# EAGLE board krajBB-Mojžiš_MatejFIN (EAGLE 7.7.0)
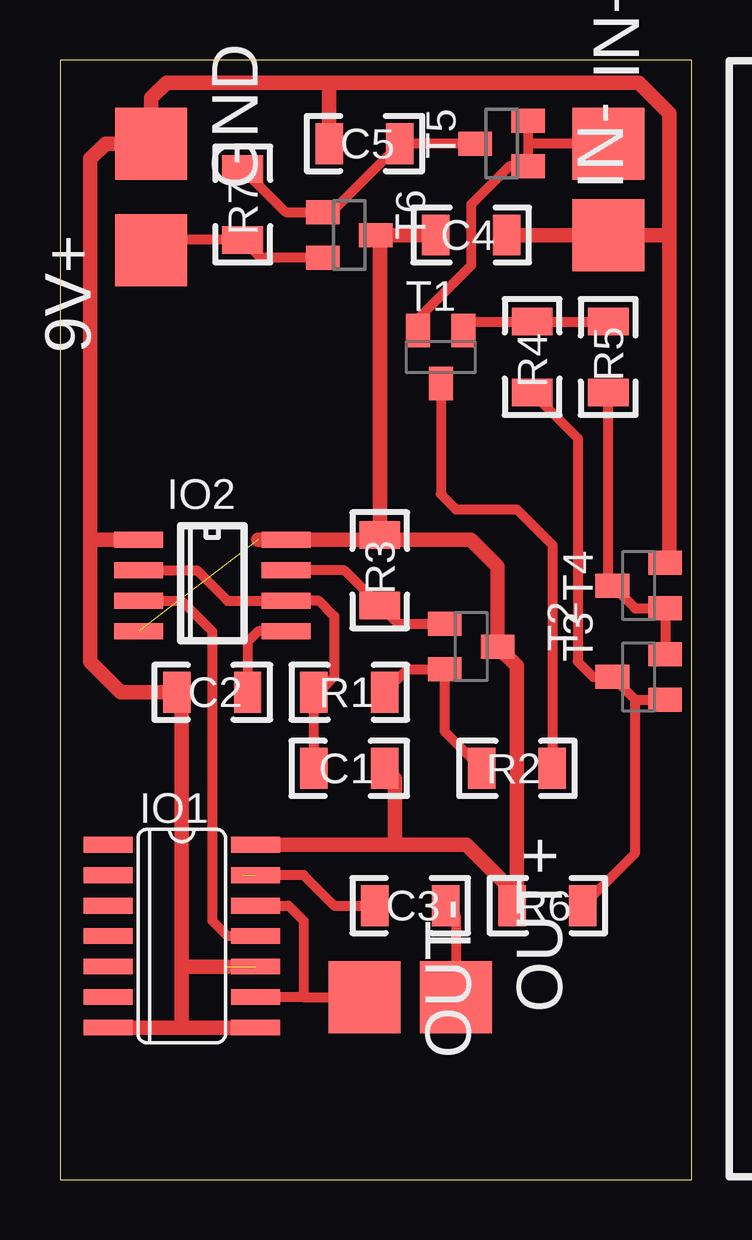
[diagram p0: board, top side]

Size 26.34 x 46.66 mm. Coordinates in mm from the lower left corner, seen from the top.
Outline: 0,0 26.34,0 26.34,46.66 0,46.66 0,0
Copper layers (1*16): Top 0.035mm / dielectric 1.5mm / Bottom 0.035mm
Design rules "default *": minimum track width 10mil, minimum drill 24mil, track to track 8mil, track to pad 8mil, pad to pad 8mil, via to via 8mil, smd to smd 8mil, copper to edge 16mil, drill to drill 8mil, minimum pad ring 10mil, minimum via ring 8mil, stop-mask expansion 4mil, vias tented up to drill 0mil, thermal gap 10mil

## Footprints (pad centres in the part's own frame; a part is rotated, then mirrored left to right if it is on the bottom)
SMD3X3 = smd 3 x 3: P$1 0,0
1206 = smd 1.143 x 1.702: 1 -1.473,0; 2 1.473,0
SO14 = smd 0.66 x 2.032: 1 -3.81,-3.073; 2 -2.54,-3.073; 3 -1.27,-3.073; 4 0,-3.073; 5 1.27,-3.073; 6 2.54,-3.073; 7 3.81,-3.073; 8 3.81,3.073; 9 2.54,3.073; 10 1.27,3.073; 11 0,3.073; 12 -1.27,3.073; 13 -2.54,3.073; 14 -3.81,3.073
SO08 = smd 0.66 x 2.032: 1 -1.905,-3.073; 2 -0.635,-3.073; 3 0.635,-3.073; 4 1.905,-3.073; 5 1.905,3.073; 6 0.635,3.073; 7 -0.635,3.073; 8 -1.905,3.073
LD-DR-3519 = drill 1 pad 1.93 long: P$1 -3,-15; P$2 3,-15
SOT23-BEC = smd 1 x 1.4: B -0.95,-1.1; C 0,1.1; E 0.95,-1.1
SOT23 = smd 1 x 1.4: 1 -0.95,-1.1; 2 0.95,-1.1; 3 0,1.1

## Placement (x,y rotation side)
9V+  SMD3X3  [SMD3X3]  3.81,38.73 270 top
C1  1u  [1206]  12.06,17.14 0 top
C2  1u  [1206]  6.35,20.32 0 top
C3  1u  [1206]  14.61,11.43 0 top
C4  1u  [1206]  17.14,39.37 180 top
C5  1u  [1206]  12.7,43.18 0 top
GND  SMD3X3  [SMD3X3]  3.81,43.18 90 top
IN+  SMD3X3  [SMD3X3]  22.86,43.18 270 top
IN-  SMD3X3  [SMD3X3]  22.86,39.37 90 top
IO1  4013D  [SO14]  5.08,10.16 270 top
IO2  NE555D  [SO08]  6.35,24.77 270 top
OUT+  SMD3X3  [SMD3X3]  16.51,7.62 90 top
OUT-  SMD3X3  [SMD3X3]  12.7,7.62 90 top
R1  100  [1206]  12.06,20.32 180 top
R2  470  [1206]  19.05,17.14 180 top
R3  10k  [1206]  13.34,25.4 90 top
R4  10k  [1206]  19.68,34.29 270 top
R5  2.2k  [1206]  22.86,34.29 90 top
R6  47k  [1206]  20.32,11.43 180 top
R7  10M  [1206]  7.62,40.64 270 top
REPRODUKTOR  LD-DR-3519  [LD-DR-3519]  73.03,23.5 0 top  (outside the outline)
T1  BC817-25  [SOT23-BEC]  15.88,34.29 180 top
T2  BC817-25  [SOT23-BEC]  17.14,22.23 270 top
T3  BC817-25  [SOT23-BEC]  24.13,20.95 90 top
T4  BC817-25  [SOT23-BEC]  24.13,24.77 90 top
T5  BSS84  [SOT23]  18.41,43.18 90 top
T6  BSS84  [SOT23]  12.06,39.37 270 top
U$1  9VBATTERY  [9VBATTERY]  41.91,24.13 0 top  (outside the outline)

## Library data of the parts
9V+ GND IN+ IN- OUT+ OUT- = solpad
C1-C5 R1-R7 = rcl
IO1 = 40xx
IO2 = linear
REPRODUKTOR = buzzer
T1-T4 = transistor-npn
T5 T6 = transistor-small-signal
U$1 = battery

## Nets
9V_1: R4.2 R6.1 T3.B T3.C
9V_2: R5.1 T3.E T4.B T4.C
+9V: C1.2 C4.2 IO1.14 IO2.4 IO2.8 R3.2 R6.2 T2.C T6.3
CLOCK: IO1.11 IO2.3
CV: C2.2 IO2.5
DIS: IO2.7 R3.1 T2.B
DIS_1: R2.1 T1.C
DIS_IN: R1.1 R2.2 T2.E
DIV: R4.1 R5.2 T1.B
GND: C2.1 C4.1 C5.1 GND.P$1 IN-.P$1 IO1.7 IO1.8 IO1.10 IO2.1 T4.E
IN: IN+.P$1 T1.E T5.1 T5.2
MOS: C5.2 R7.1 T5.3 T6.1
OUT: C3.1 IO1.13
REP: C3.2 OUT+.P$1
REP+: IO1.9 IO1.12 OUT-.P$1
THR: C1.1 IO2.2 IO2.6 R1.2
VIN: 9V+.P$1 R7.2 T6.2

## Tracks (layer width: path | path; a pad name or v marks a point on that pad's centre or on a via)
9V_1
  Top 0.406: 23.98,20 T3.C 22.23,20.95 21.59,21.59 21.59,30.91 R4.2 | 23.98,20 T3.B | R6.1 23.98,13.62 23.98,20
9V_2
  Top 0.406: T3.E T4.B 23.98,23.82 T4.C 22.86,24.93 R5.1 23.03,32.65
+9V  (1 unrouted)
  Top 0.61: 8.26,26.67 IO2.8 13.13,26.67 R3.2 | R3.2 13.54,26.67 17.14,26.67 18.25,25.57 T2.C 19.05,21.42 19.05,11.43 R6.2 18.85,12.06 16.94,13.97 13.97,13.97 | C4.2 T6.3 13.34,39.2 R3.2 | 13.97,13.97 IO1.14 | C1.2 13.97,16.71 13.97,13.97
CLOCK
  Top 0.406: IO1.11 6.99,10.16 6.35,10.79 6.35,22.86 5.08,24.13 IO2.3
CV
  Top 0.406: IO2.5 8.26,22.86 7.82,22.43 C2.2
DIS
  Top 0.406: T2.B 14.09,23.18 R3.1 11.86,25.4 IO2.7
DIS_1
  Top 0.406: T1.C 15.88,28.57 16.51,27.94 19.05,27.94 20.52,26.47 R2.1
DIS_IN
  Top 0.406: 13.54,19.89 R1.1 14.49,21.27 T2.E 16.05,18.68 R2.2
DIV
  Top 0.406: T1.B 17.2,35.76 R4.1 R5.2
GND  (1 unrouted)
  Top 0.61: IO1.8 5.08,6.35 | 5.08,6.35 IO1.7 | 11.23,45.72 4.45,45.72 3.81,45.09 GND.P$1 1.91,43.18 1.27,42.55 1.27,26.67 | 11.23,45.72 24.13,45.72 25.4,44.45 25.4,39.37 | C5.1 11.23,45.72 | C4.1 IN-.P$1 25.4,39.37 | 5.08,8.89 5.08,20.12 C2.1 2.54,20.32 1.27,21.59 1.27,26.67 | 5.08,8.89 5.08,6.35 | 6.99,8.89 5.08,8.89 | IO2.1 1.27,26.67 | T4.E 25.4,25.89 25.4,39.37
IN
  Top 0.406: T5.2 19.52,43.18 | 19.52,43.18 T5.1 18.73,42.23 17.14,40.64 17.14,38.1 14.93,35.88 T1.E | IN+.P$1 19.52,43.18
MOS
  Top 0.406: T5.3 C5.2 11.31,40.32 T6.1 9.41,40.32 R7.1
OUT  (1 unrouted)
  Top 0.406: 7.62,12.7 10.16,12.7 11.43,11.43 C3.1
REP
  Top 0.406: C3.2 16.51,11 OUT+.P$1
REP+
  Top 0.406: 10.16,7.62 IO1.9 | IO1.12 9.53,11.43 10.16,10.79 10.16,7.62 | 10.16,7.62 OUT-.P$1
THR
  Top 0.406: C1.1 R1.2 10.79,20.32 11.43,20.95 11.43,23.5 10.79,24.13 IO2.6 6.99,24.13 5.71,25.4 IO2.2
VIN
  Top 0.406: T6.2 8.37,38.42 R7.2 4.24,39.17 9V+.P$1